# Altium PCB 示波器AD板最终实物版图.PcbDoc (part 2 of 2)
Units mil, origin at the board's own origin, x right, y up, seen from the top; angles counter-clockwise.
Board outline 10285 x 5540 mil, 2 copper layers (Top Layer, Bottom Layer); 84 components, 55 nets, 271 pads, 0 vias.
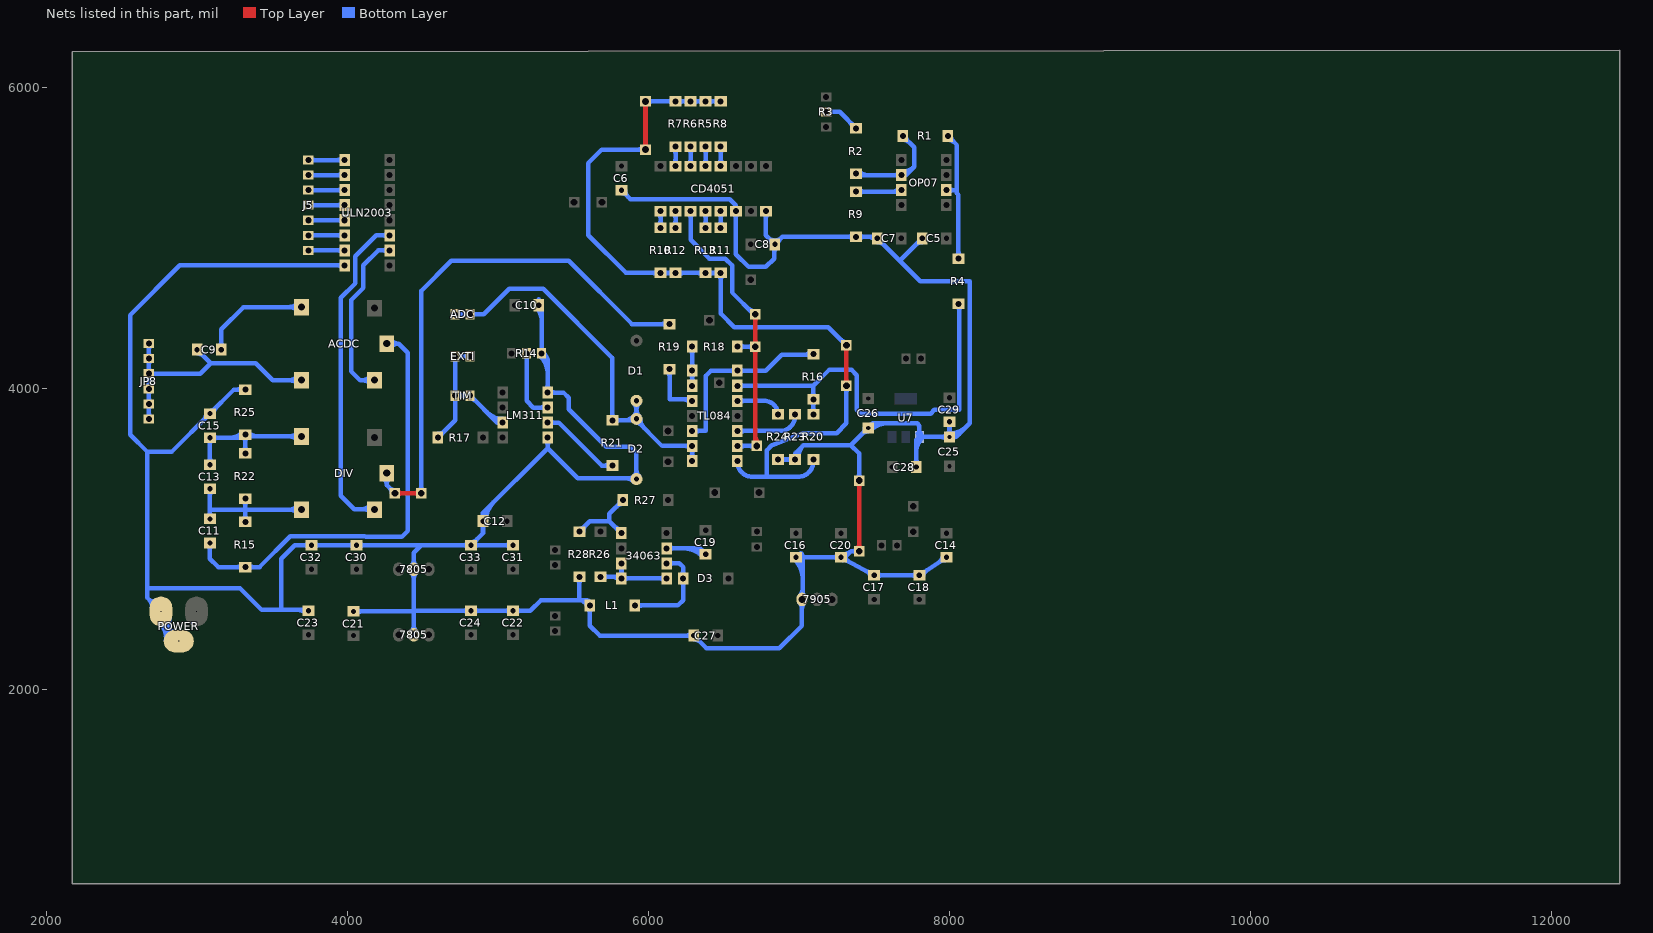
[diagram p2: the nets of this part, all layers, seen from the top]

## Nets (pads, with @x,y where several pads share a name; then routed paths per layer and width w, separated by ;. In a path a pad name is that pad's centre, name@x,y a point inside that pad or via, vN(x,y) a via of type N, cw(c..) or ccw(c..) an arc to the next point about the centre after c; other vN are vias at no path point) (continued)
GND: 7805.2 7905.1 C5.2 C6.1 C7.2 C8.2 C10.2 C12.2 C14.2 C15.1 C16.2 C17.1 C18.2 C20.1 C21.1 C22.1 C23.2 C24.2 C25.1 C26.1 C27.1 C28.2 C29.2 C30.1 C31.1 C32.2 C33.2 CD4051.6 CD4051.8 D2.1 L1.1 LM311.1 LM311.4 pad.7@7400,3390 pad.8@7400,2920 POWER.2 POWER.3 R9.1 R14.1 R23.1 R24.1 R25.2 R28.2 U7.1 ULN2003.8 | length 31496.3
  Top Layer w30: pad.8@7385.86,2934.14 ccw(c7351.72,2968.28) 7400,2968.28 ccw(c7448.28,2968.28) pad.8@7414.14,2934.14 ; pad.7@7385.86,3375.86 cw(c7351.72,3341.72) 7400,3341.72 cw(c7448.28,3341.72) pad.7@7414.14,3375.86 ; pad.8@7400,2920 pad.7@7400,3390
  Bottom Layer w30: POWER.3@2700.19,2549.62 ccw(c2639.35,2554.34) 2682.5,2597.49 ccw(c2706.01,2621) POWER.3@2725.27,2593.89 ; POWER.3@2747.52,2453.46 cw(c2635.76,2341.7) POWER.2@2793.23,2328.12 ; POWER.3@2760.01,2494.98 ccw(c2831.4,2474.57) 2778.9,2422.08 ; POWER.3@2788.86,2486.73 ccw(c2887.47,2458.55) POWER.2@2814.95,2386.03 ; 2793.09,2407.89 cw(c2719.66,2334.47) POWER.2@2823.12,2325.55 ; 2793.26,2407.72 ccw(c2853.01,2467.47) POWER.2@2853.01,2382.97 ; POWER.3@2817.7,2478.49 ccw(c2943.53,2442.52) POWER.2@2850.99,2349.98 ; POWER.2@2878.01,2322.97 2760.01,2440.96 POWER.3@2760.01,2519.98 2670,2609.99 2670,2675 ; 3042.32,3792.32 ccw(c2999.64,3835) C15.1@3060,3835 ; C15.1@3054.39,3804.39 cw(c3080,3778.79) C15.1@3080,3815 ; C15.1@3090,3855 ccw(c3090,3891.21) C15.1@3115.61,3865.61 ; C15.1@3110,3835 cw(c3170.36,3835) 3127.68,3877.68 ; R25.2@3300.86,3980.86 ccw(c3266.72,3946.72) 3266.72,3995 ccw(c3266.72,4043.28) R25.2@3300.86,4009.14 ; R25.2@3320,3995 3245,3995 C15.1@3085,3835 2830,3580 2670,3580 ; 3674.64,2530 cw(c3674.64,2464.64) C23.2@3720.86,2510.86 ; 3698.79,2530 ccw(c3698.79,2561.21) C23.2@3720.86,2539.14 ; C23.2@3740,2525 3735,2530 3560,2530 ; C32.2@3740.86,2945.86 ccw(c3706.72,2911.72) 3706.72,2960 ccw(c3706.72,3008.28) C32.2@3740.86,2974.14 ; C32.2@3779.14,2945.86 cw(c3813.28,2911.72) 3813.28,2960 cw(c3813.28,3008.28) C32.2@3779.14,2974.14 ; ULN2003.8@3965.86,4805.86 ccw(c3931.72,4771.72) 3931.72,4820 ccw(c3931.72,4868.28) ULN2003.8@3965.86,4834.14 ; ULN2003.8@3980,4820 2885,4820 2555,4490 2555,3695 2670,3580 ; C21.1@4040,2520 4440,2520 ; C30.1@4040.86,2945.86 ccw(c4006.72,2911.72) 4006.72,2960 ccw(c4006.72,3008.28) C30.1@4040.86,2974.14 ; C21.1@4059.14,2505.86 cw(c4093.28,2471.72) 4093.28,2520 cw(c4093.28,2568.28) C21.1@4059.14,2534.14 ; C30.1@4079.14,2945.86 cw(c4113.28,2911.72) 4113.28,2960 cw(c4113.28,3008.28) C30.1@4079.14,2974.14 ; 7805.2@4424.09,2388.41 ccw(c4385.68,2426.82) 4440,2426.82 ccw(c4494.32,2426.82) 7805.2@4455.91,2388.41 ; 7805.2@4424.09,2776.59 cw(c4385.68,2738.18) 4440,2738.18 cw(c4494.32,2738.18) 7805.2@4455.91,2776.59 ; 7805.2@4424.09,2823.41 ccw(c4385.68,2861.82) 4440,2861.82 ccw(c4494.32,2861.82) 7805.2@4455.91,2823.41 ; 7805.2@4440,2365 4440,2520 ; C24.2@4800.86,2510.86 ccw(c4766.72,2476.72) 4766.72,2525 ccw(c4766.72,2573.28) C24.2@4800.86,2539.14 ; C33.2@4800.86,2945.86 ccw(c4766.72,2911.72) 4766.72,2960 ccw(c4766.72,3008.28) C33.2@4800.86,2974.14 ; C33.2@4825,2980 ccw(c4825,3016.21) C33.2@4850.61,2990.61 ; C24.2@4839.14,2510.86 cw(c4873.28,2476.72) 4873.28,2525 cw(c4873.28,2573.28) C24.2@4839.14,2539.14 ; C33.2@4839.14,2945.86 cw(c4873.28,2911.72) 4873.28,2960 cw(c4873.28,3008.28) C33.2@4839.14,2974.14 ; C33.2@4845,2960 cw(c4905.36,2960) 4862.68,3002.68 ; C12.2@4885.86,3100.86 cw(c4851.72,3066.72) 4900,3066.72 cw(c4948.28,3066.72) C12.2@4914.14,3100.86 ; C12.2@4885.86,3139.14 ccw(c4851.72,3173.28) 4900,3173.28 ccw(c4948.28,3173.28) C12.2@4914.14,3139.14 ; C12.2@4890,3125 cw(c4986.57,3125) 4918.28,3193.28 ; C12.2@4920,3125 cw(c5088.99,3125) 4969.5,3244.5 ; C22.1@5080.86,2510.86 ccw(c5046.72,2476.72) 5046.72,2525 ccw(c5046.72,2573.28) C22.1@5080.86,2539.14 ; C31.1@5080.86,2945.86 ccw(c5046.72,2911.72) 5046.72,2960 ccw(c5046.72,3008.28) C31.1@5080.86,2974.14 ; C31.1@5100,2960 4965,2960 C33.2@4820,2960 ; C22.1@5119.14,2510.86 cw(c5153.28,2476.72) 5153.28,2525 cw(c5153.28,2573.28) C22.1@5119.14,2539.14 ; C10.2@5255.86,4535.86 cw(c5173.43,4453.43) 5290,4453.43 ; 5270,4595 C10.2@5270,4555 ; R14.1@5279.39,4219.39 cw(c5157.22,4097.22) 5330,4097.22 ; R14.1@5279.39,4250.61 ccw(c5253.79,4276.21) 5290,4276.21 ccw(c5326.21,4276.21) R14.1@5300.61,4250.61 ; R14.1@5290,4215 cw(c5290,4166.72) 5324.14,4200.86 ; C10.2@5290,4555 C10.2@5270,4555 ; R14.1@5300.61,4240.61 cw(c5229.64,4169.64) 5330,4169.64 ; LM311.1@5315.86,3655.86 cw(c5281.72,3621.72) 5330,3621.72 cw(c5378.28,3621.72) LM311.1@5344.14,3655.86 ; LM311.4@5315.86,3994.14 ccw(c5281.72,4028.28) 5330,4028.28 ccw(c5378.28,4028.28) LM311.4@5344.14,3994.14 ; LM311.1@5330,3675 5330,3605 ; LM311.4@5344.14,3960.86 cw(c5378.28,3926.72) 5378.28,3975 cw(c5378.28,4023.28) LM311.4@5344.14,3989.14 ; R28.2@5525.86,2735.86 cw(c5491.72,2701.72) 5540,2701.72 cw(c5588.28,2701.72) R28.2@5554.14,2735.86 ; R28.2@5540,2750 5540,2595 ; L1.1@5582,2595 cw(c5582,2555.4) L1.1@5619.46,2568.24 ; L1.1@5591.08,2558.51 ccw(c5540,2541) 5540,2595 ; L1.1@5595.86,2540.86 cw(c5561.72,2506.72) 5610,2506.72 cw(c5658.28,2506.72) L1.1@5624.14,2540.86 ; C6.1@5820,5320 5880,5260 6540,5260 6580,5220 ; C6.1@5825,5300 cw(c5825,5263.79) C6.1@5850.61,5289.39 ; C6.1@5845,5320 ccw(c5905.36,5320) 5862.68,5277.32 ; 5847.57,3405 cw(c5847.57,3327.57) D2.1@5902.32,3382.32 ; 5871.72,3405 ccw(c5871.72,3448.28) 5902.32,3417.68 ccw(c5859.64,3460.36) 5920,3460.36 ccw(c5980.36,3460.36) D2.1@5937.68,3417.68 ; C27.1@6285.86,2345.86 ccw(c6251.72,2311.72) 6251.72,2360 ccw(c6251.72,2408.28) C27.1@6285.86,2374.14 ; C27.1@6300,2335 cw(c6300,2274.64) 6342.68,2317.32 ; C27.1@6320,2355 ccw(c6356.21,2355) C27.1@6330.61,2329.39 ; 6563.82,5236.18 cw(c6512.26,5184.63) CD4051.6@6584.97,5179.26 ; CD4051.6@6565.86,5165.86 cw(c6531.72,5131.72) 6580,5131.72 cw(c6628.28,5131.72) CD4051.6@6594.14,5165.86 ; CD4051.6@6568,5196 ccw(c6550,5220) 6580,5220 ; CD4051.6@6592,5196 cw(c6610,5220) 6580,5220 ; CD4051.8@6765.86,5165.86 cw(c6731.72,5131.72) 6780,5131.72 cw(c6828.28,5131.72) CD4051.8@6794.14,5165.86 ; CD4051.8@6780,5180 6780,5020 C8.2@6840,4960 ; 6797.32,5002.68 ccw(c6840,5045.36) 6840,4985 ccw(c6840,5045.36) 6882.68,5002.68 ; C8.2@6809.39,4990.61 cw(c6783.79,4965) C8.2@6820,4965 ; C8.2@6825.86,4940.86 cw(c6803.79,4918.79) 6835,4918.79 ; 6835,4894.64 cw(c6900.36,4894.64) C8.2@6854.14,4940.86 ; R24.1@6860,3530 R23.1@6975,3530 6975,3570 ; C8.2@6860,4965 cw(c6896.21,4965) C8.2@6870.61,4990.61 ; R24.1@6879.14,3515.86 cw(c6913.28,3481.72) 6913.28,3530 cw(c6913.28,3578.28) R24.1@6879.14,3544.14 ; R23.1@6955.86,3515.86 ccw(c6921.72,3481.72) 6921.72,3530 ccw(c6921.72,3578.28) R23.1@6955.86,3544.14 ; R23.1@6963,3546 ccw(c6945,3570) 6975,3570 ; R23.1@6970.11,3528.5 cw(c7033.01,3538.04) 6988.03,3583.03 ; C16.2@6970.86,2865.86 cw(c6840.15,2735.15) 7025,2735.15 ; C16.2@6980,2880 7025,2880 ; R23.1@6987,3546 cw(c7005,3570) 6975,3570 ; C16.2@6992.07,2887.07 cw(c6912.57,2807.57) 7025,2807.57 ; C16.2@6999.14,2865.86 cw(c7033.28,2831.72) 7033.28,2880 cw(c7033.28,2928.28) C16.2@6999.14,2894.14 ; R23.1@6999.77,3533 cw(c7105.89,3549.1) 7030,3625 ; 7905.1@7004.09,2576.59 cw(c6965.68,2538.18) 7020,2538.18 cw(c7074.32,2538.18) 7905.1@7035.91,2576.59 ; 7905.1@7004.09,2623.41 ccw(c6953.61,2673.89) 7025,2673.89 ; C16.2@7013.28,2908.28 cw(c6985,2880) 7025,2880 ; 7025,2649.75 ccw(c7062.25,2649.75) 7905.1@7035.91,2623.41 ; C20.1@7260.86,2865.86 ccw(c7226.72,2831.72) 7226.72,2880 ccw(c7226.72,2928.28) C20.1@7260.86,2894.14 ; C20.1@7286.99,2899.9 ccw(c7293.95,2969.36) 7343.31,2920 ; C20.1@7290.64,2860.81 cw(c7301.96,2822.33) 7321.17,2857.54 ; C20.1@7304.19,2885.64 ccw(c7358.35,2901.57) 7331.32,2852.01 ; R9.1@7360.86,4995.86 ccw(c7326.72,4961.72) 7326.72,5010 ccw(c7326.72,5058.28) R9.1@7360.86,5024.14 ; pad.8@7385.86,2905.86 ccw(c7351.72,2871.72) 7351.72,2920 ccw(c7351.72,2968.28) pad.8@7385.86,2934.14 ; pad.7@7385.86,3404.14 ccw(c7351.72,3438.28) 7400,3438.28 ccw(c7448.28,3438.28) pad.7@7414.14,3404.14 ; R9.1@7399.14,4995.86 cw(c7433.28,4961.72) 7433.28,5010 cw(c7433.28,5058.28) R9.1@7399.14,5024.14 ; pad.8@7400,2920 7343.31,2920 ; pad.7@7400,3390 7400,3570 7345,3625 ; C26.1@7437.5,3740 cw(c7383.18,3740) 7421.59,3701.59 cw(c7460,3663.18) C26.1@7460,3717.5 ; 7448.68,2787.99 cw(c7421.65,2738.43) C17.1@7475.81,2754.36 ; C26.1@7454.7,3745.3 cw(c7514.32,3685.68) 7514.32,3770 ; 7458.83,2782.46 ccw(c7478.04,2817.67) C17.1@7489.36,2779.19 ; 7459.64,5010 cw(c7459.64,4944.64) C7.2@7505.86,4990.86 ; C26.1@7475.91,3724.09 cw(c7586.75,3613.25) 7586.75,3770 ; 7483.79,5010 ccw(c7483.79,5041.21) C7.2@7505.86,5019.14 ; C17.1@7519.14,2745.86 cw(c7553.28,2711.72) 7553.28,2760 cw(c7553.28,2808.28) C17.1@7519.14,2774.14 ; C7.2@7520,4975 cw(c7520,4914.64) 7562.68,4957.32 ; C7.2@7540,4995 ccw(c7576.21,4995) C7.2@7550.61,4969.39 ; C28.2@7765.86,3499.14 ccw(c7731.72,3533.28) 7780,3533.28 ccw(c7828.28,3533.28) C28.2@7794.14,3499.14 ; 7777.32,4957.32 cw(c7820,4914.64) C5.2@7820,4975 ; C28.2@7780,3480 7780,3660 U7.1@7795,3675 ; 7780,3586.71 cw(c7883.29,3586.71) U7.1@7810.25,3659.75 ; C18.2@7780.86,2745.86 ccw(c7746.72,2711.72) 7746.72,2760 ccw(c7746.72,2808.28) C18.2@7780.86,2774.14 ; C5.2@7789.39,4969.39 ccw(c7763.79,4995) C5.2@7800,4995 ; U7.1@7789.75,3700.25 ccw(c7764.99,3725.01) 7800,3725.01 ccw(c7835.01,3725.01) U7.1@7810.25,3700.25 ; U7.1@7795,3671.72 U7.1@7800,3680 ; U7.1@7795,3698.81 U7.1@7795,3675 ; C18.2@7808.92,2779.61 ccw(c7816.53,2817.67) C18.2@7838.07,2785.38 ; U7.1@7810.25,3669.75 cw(c7835.01,3644.99) 7835.01,3680 cw(c7835.01,3715.01) U7.1@7810.25,3690.25 ; C5.2@7820,5000 7673.35,4853.35 7666.65,4853.35 ; C18.2@7824.61,2756.08 cw(c7881.24,2744.75) 7849.21,2792.81 ; 7930.79,2847.19 ccw(c7898.76,2895.25) C14.2@7955.39,2883.92 ; C14.2@7941.93,2854.62 cw(c7963.47,2822.33) C14.2@7971.08,2860.39 ; C14.2@7980,2880 C18.2@7800,2760 C17.1@7500,2760 C20.1@7280,2880 ; C25.1@7984.09,3664.09 ccw(c7945.68,3625.68) 7945.68,3680 ccw(c7945.68,3734.32) 7984.09,3695.91 ccw(c7945.68,3734.32) 8000,3734.32 ccw(c8054.32,3734.32) C25.1@8015.91,3695.91 ; C29.2@7985.86,3765.86 cw(c7951.72,3731.72) 8000,3731.72 cw(c8048.28,3731.72) C29.2@8014.14,3765.86 ; C25.1@8000,3672.5 ccw(c8000,3763.03) 8064.02,3699.02 ; C25.1@8000,3702.5 ccw(c8000,3865.46) 8115.23,3750.23 ; C29.2@8000,3780 C25.1@8000,3680 ; C25.1@8018,3666.5 cw(c8045,3646.25) 8045,3680 ; C25.1@8018,3693.5 ccw(c8045,3713.75) 8045,3680 ; 2670,2675 2670,3580 ; 2670,2675 3285,2675 3430,2530 3560,2530 ; 3560,2530 3560,2870 3650,2960 C32.2@3760,2960 C30.1@4060,2960 4490,2960 ; 4440,2520 7805.2@4440,2800 4440,2910 4490,2960 ; 4440,2520 4445,2525 C24.2@4820,2525 C22.1@5100,2525 5215,2525 5285,2595 5540,2595 ; 4490,2960 C33.2@4820,2960 ; C33.2@4820,2960 4900,3040 C12.2@4900,3120 4900,3175 5330,3605 ; C10.2@5270,4555 5290,4535 R14.1@5290,4235 5330,4195 LM311.4@5330,3975 5435,3975 5470,3940 5470,3865 5720,3615 5880,3615 5920,3575 D2.1@5920,3400 5915,3405 5530,3405 5330,3605 ; 5540,2595 5575,2595 L1.1@5610,2560 5610,2425 5675,2360 C27.1@6300,2360 6385,2275 6870,2275 7020,2425 7905.1@7020,2600 7025,2605 7025,2880 ; 6580,5220 CD4051.6@6580,5180 6580,4895 6665,4810 6780,4810 6835,4865 6835,4955 C8.2@6840,4960 ; C8.2@6840,4960 6890,5010 R9.1@7380,5010 7510,5010 C7.2@7520,5000 7666.65,4853.35 ; 6975,3570 7030,3625 ; 7025,2880 ccw(c7025,2850) 7001,2868 cw(c7025,2850) 7025,2880 ; 7025,2880 cw(c7025,2910) 7001,2892 ccw(c7025,2910) 7025,2880 ; 7025,2880 C20.1@7280,2880 ; 7030,3625 7345,3625 ; C20.1@7280,2880 7303.31,2880 7343.31,2920 ; 7345,3625 C26.1@7460,3740 7490,3770 7785,3770 7800,3755 U7.1@7800,3680 ; 7666.65,4853.35 7805,4715 8135,4715 8135,3770 8045,3680 ; U7.1@7795,3675 U7.1@7800,3680 ; U7.1@7795,3675 7795,3671.74 U7.1@7800,3680 ; U7.1@7800,3680 C25.1@8000,3680 ; C25.1@8000,3680 8045,3680
NetC9_1: ACDC.3 C9.1 JP8.1 JP8.2 JP8.3 JP8.4 JP8.5 JP8.6 | length 2548.2
  Bottom Layer w30: JP8.6@2669.39,3810.61 ccw(c2643.79,3836.21) 2680,3836.21 ccw(c2716.21,3836.21) JP8.6@2690.61,3810.61 ; JP8.5@2669.39,3889.39 cw(c2643.79,3863.79) 2680,3863.79 cw(c2716.21,3863.79) JP8.5@2690.61,3889.39 ; JP8.5@2669.39,3910.61 ccw(c2643.79,3936.21) 2680,3936.21 ccw(c2716.21,3936.21) JP8.5@2690.61,3910.61 ; JP8.4@2669.39,3989.39 cw(c2643.79,3963.79) 2680,3963.79 cw(c2716.21,3963.79) JP8.4@2690.61,3989.39 ; JP8.4@2669.39,4010.61 ccw(c2643.79,4036.21) 2680,4036.21 ccw(c2716.21,4036.21) JP8.4@2690.61,4010.61 ; JP8.3@2669.39,4089.39 cw(c2643.79,4063.79) 2680,4063.79 cw(c2716.21,4063.79) JP8.3@2690.61,4089.39 ; JP8.3@2669.39,4110.61 ccw(c2643.79,4136.21) 2680,4136.21 ccw(c2716.21,4136.21) JP8.3@2690.61,4110.61 ; JP8.2@2669.39,4189.39 cw(c2643.79,4163.79) 2680,4163.79 cw(c2716.21,4163.79) JP8.2@2690.61,4189.39 ; JP8.2@2669.39,4210.61 ccw(c2643.79,4236.21) 2680,4236.21 ccw(c2716.21,4236.21) JP8.2@2690.61,4210.61 ; JP8.1@2669.39,4289.39 cw(c2643.79,4263.79) 2680,4263.79 cw(c2716.21,4263.79) JP8.1@2690.61,4289.39 ; JP8.6@2680,3800 JP8.5@2680,3900 JP8.4@2680,4000 JP8.3@2680,4100 ; JP8.1@2680,4300 JP8.2@2680,4200 JP8.3@2680,4100 ; JP8.3@2695.61,4089.39 cw(c2721.21,4063.79) 2721.21,4100 cw(c2721.21,4136.21) JP8.3@2695.61,4110.61 ; C9.1@3000,4235 cw(c3000,4174.64) 3042.68,4217.32 ; C9.1@3000,4260 3090,4170 ; C9.1@3020,4255 ccw(c3056.21,4255) C9.1@3030.61,4229.39 ; ACDC.3@3669.67,4032.9 ccw(c3611.26,3974.49) 3611.26,4057.09 ccw(c3611.26,4139.68) ACDC.3@3669.67,4081.28 ; ACDC.3@3693.86,4057.09 3502.91,4057.09 3390,4170 3090,4170 ; JP8.3@2680,4100 3020,4100 3090,4170
NetC9_2: ACDC.2 C9.2 | length 935.7
  Bottom Layer w30: C9.2@3145.86,4279.14 ccw(c3111.72,4313.28) 3160,4313.28 ccw(c3208.28,4313.28) C9.2@3174.14,4279.14 ; C9.2@3160,4260 3160,4395 3307.91,4542.91 ACDC.2@3693.86,4542.91 ; ACDC.2@3669.67,4518.72 ccw(c3611.26,4460.32) 3611.26,4542.91 ccw(c3611.26,4625.51) ACDC.2@3669.67,4567.1
NetC11_1: 
NetC11_2: ACDC.1 C11.2 R15.1 | length 3247.3
  Bottom Layer w30: C11.2@3070.86,2960.86 cw(c3036.72,2926.72) 3085,2926.72 cw(c3133.28,2926.72) C11.2@3099.14,2960.86 ; C11.2@3085,2975 3085,2870 3140,2815 R15.1@3320,2815 3415,2815 3620,3020 4115.36,3020 4120.36,3015 4360,3015 4400,3055 4400,4240 4340,4300 ; R15.1@3300.86,2800.86 ccw(c3266.72,2766.72) 3266.72,2815 ccw(c3266.72,2863.28) R15.1@3300.86,2829.14 ; R15.1@3339.14,2800.86 cw(c3373.28,2766.72) 3373.28,2815 cw(c3373.28,2863.28) R15.1@3339.14,2829.14 ; ACDC.1@4260,4300 4340,4300 ; ACDC.1@4284.74,4276.37 cw(c4340,4223.58) 4340,4300 ; ACDC.1@4284.74,4323.63 ccw(c4340,4376.42) 4340,4300
NetC13_1: C13.1 C15.2 DIV.2 R22.2 R25.1 | length 1592.4
  Bottom Layer w30: C13.1@3070.86,3509.14 ccw(c3036.72,3543.28) 3085,3543.28 ccw(c3133.28,3543.28) C13.1@3099.14,3509.14 ; C15.2@3070.86,3660.86 cw(c3036.72,3626.72) 3085,3626.72 cw(c3133.28,3626.72) C15.2@3099.14,3660.86 ; C13.1@3085,3495 C15.2@3085,3675 3300,3675 R25.1@3320,3695 ; C15.2@3104.14,3660.86 cw(c3138.28,3626.72) 3138.28,3675 cw(c3138.28,3723.28) C15.2@3104.14,3689.14 ; 3218.43,3675 ccw(c3218.43,3791.57) R25.1@3300.86,3709.14 ; R22.2@3305.86,3584.14 ccw(c3271.72,3618.28) 3320,3618.28 ccw(c3368.28,3618.28) R22.2@3334.14,3584.14 ; R25.1@3305.86,3680.86 cw(c3271.72,3646.72) 3320,3646.72 cw(c3368.28,3646.72) R25.1@3334.14,3680.86 ; R22.2@3320,3570 R25.1@3320,3695 ; R25.1@3339.14,3709.14 ccw(c3397.43,3767.43) 3397.43,3685 ; 3606.22,3685 cw(c3606.22,3595.28) DIV.2@3669.67,3658.72 ; 3616.3,3685 ccw(c3616.3,3760.47) DIV.2@3669.67,3707.1 ; DIV.2@3693.86,3682.91 3691.77,3685 3330,3685 R25.1@3320,3695
NetC19_2: 34063.3 C19.2 | length 661.4
  Bottom Layer w30: 34063.3@6120,2940 6340,2940 C19.2@6380,2900 ; 34063.3@6134.14,2925.86 cw(c6168.28,2891.72) 6168.28,2940 cw(c6168.28,2988.28) 34063.3@6134.14,2954.14 ; 6230.15,2940 cw(c6230.15,2755.15) C19.2@6360.86,2885.86 ; 6302.57,2940 cw(c6302.57,2827.57) C19.2@6382.07,2907.07 ; 6337.5,2942.5 cw(c6295.26,2900.25) C19.2@6355,2900.06 ; C19.2@6349.39,2930.61 ccw(c6375,2956.21) C19.2@6375,2920
NetD1_1: ADC.1 ADC.2 D1.1 D2.2 R21.2 TL084.6 TL084.7 | length 3449.9
  Bottom Layer w30: ADC.1@4715,4495 ADC.2@4815,4495 4905,4495 5075,4665 5300,4665 5760,4205 R21.2@5760,3790 D2.2@5920,3790 ; ADC.1@4725.61,4484.39 cw(c4751.21,4458.79) 4751.21,4495 cw(c4751.21,4531.21) ADC.1@4725.61,4505.61 ; ADC.2@4804.39,4484.39 ccw(c4778.79,4458.79) 4778.79,4495 ccw(c4778.79,4531.21) ADC.2@4804.39,4505.61 ; ADC.2@4825.61,4484.39 cw(c4851.21,4458.79) 4851.21,4495 cw(c4851.21,4531.21) ADC.2@4825.61,4505.61 ; R21.2@5745.86,3804.14 ccw(c5711.72,3838.28) 5760,3838.28 ccw(c5808.28,3838.28) R21.2@5774.14,3804.14 ; R21.2@5779.14,3775.86 cw(c5813.28,3741.72) 5813.28,3790 cw(c5813.28,3838.28) R21.2@5779.14,3804.14 ; 5835.5,3790 ccw(c5835.5,3884.5) 5902.32,3817.68 ccw(c5859.64,3860.36) 5920,3860.36 ccw(c5980.36,3860.36) D2.2@5937.68,3817.68 ; D1.1@5902.32,3902.32 cw(c5859.64,3859.64) 5920,3859.64 cw(c5980.36,3859.64) D1.1@5937.68,3902.32 ; D2.2@5920,3775 cw(c5920,3738.79) 5945.61,3764.39 ; D1.1@5920,3910 D2.2@5920,3790 ; D2.2@5945,3800 ccw(c6029.5,3800) 5969.75,3740.25 ; TL084.7@6275.86,3539.14 ccw(c6241.72,3573.28) 6290,3573.28 ccw(c6338.28,3573.28) TL084.7@6304.14,3539.14 ; TL084.6@6275.86,3600.86 cw(c6241.72,3566.72) 6290,3566.72 cw(c6338.28,3566.72) TL084.6@6304.14,3600.86 ; TL084.6@6275.86,3605.86 ccw(c6241.72,3571.72) 6241.72,3620 ccw(c6241.72,3668.28) TL084.6@6275.86,3634.14 ; TL084.7@6290,3520 TL084.6@6290,3620 6090,3620 D2.2@5920,3790
NetD3_2: 34063.2 D3.2 L1.2 | length 978.2
  Bottom Layer w30: L1.2@5910,2560 6195,2560 6230,2595 D3.2@6230,2740 6230,2815 6205,2840 34063.2@6120,2840 ; L1.2@5924.14,2545.86 cw(c5958.28,2511.72) 5958.28,2560 cw(c5958.28,2608.28) L1.2@5924.14,2574.14 ; 34063.2@6134.14,2825.86 cw(c6168.28,2791.72) 6168.28,2840 cw(c6168.28,2888.28) 34063.2@6134.14,2854.14 ; D3.2@6215.86,2720.86 cw(c6181.72,2686.72) 6230,2686.72 cw(c6278.28,2686.72) D3.2@6244.14,2720.86 ; D3.2@6215.86,2759.14 ccw(c6181.72,2793.28) 6230,2793.28 ccw(c6278.28,2793.28) D3.2@6244.14,2759.14
NetJ5_1: J5.1 ULN2003.1 | length 372.7
  Bottom Layer w30: J5.1@3740,5520 ULN2003.1@3980,5520 ; J5.1@3755.61,5509.39 cw(c3781.21,5483.79) 3781.21,5520 cw(c3781.21,5556.21) J5.1@3755.61,5530.61 ; ULN2003.1@3965.86,5505.86 ccw(c3931.72,5471.72) 3931.72,5520 ccw(c3931.72,5568.28) ULN2003.1@3965.86,5534.14
NetJ5_2: J5.2 ULN2003.2 | length 372.7
  Bottom Layer w30: J5.2@3740,5420 ULN2003.2@3980,5420 ; J5.2@3755.61,5409.39 cw(c3781.21,5383.79) 3781.21,5420 cw(c3781.21,5456.21) J5.2@3755.61,5430.61 ; ULN2003.2@3965.86,5405.86 ccw(c3931.72,5371.72) 3931.72,5420 ccw(c3931.72,5468.28) ULN2003.2@3965.86,5434.14
NetJ5_3: J5.3 ULN2003.3 | length 372.7
  Bottom Layer w30: J5.3@3740,5320 ULN2003.3@3980,5320 ; J5.3@3755.61,5309.39 cw(c3781.21,5283.79) 3781.21,5320 cw(c3781.21,5356.21) J5.3@3755.61,5330.61 ; ULN2003.3@3965.86,5305.86 ccw(c3931.72,5271.72) 3931.72,5320 ccw(c3931.72,5368.28) ULN2003.3@3965.86,5334.14
NetJ5_4: J5.4 ULN2003.4 | length 372.7
  Bottom Layer w30: J5.4@3740,5220 ULN2003.4@3980,5220 ; J5.4@3755.61,5209.39 cw(c3781.21,5183.79) 3781.21,5220 cw(c3781.21,5256.21) J5.4@3755.61,5230.61 ; ULN2003.4@3965.86,5205.86 ccw(c3931.72,5171.72) 3931.72,5220 ccw(c3931.72,5268.28) ULN2003.4@3965.86,5234.14
NetJ5_5: J5.5 ULN2003.5 | length 372.7
  Bottom Layer w30: J5.5@3740,5120 ULN2003.5@3980,5120 ; J5.5@3755.61,5109.39 cw(c3781.21,5083.79) 3781.21,5120 cw(c3781.21,5156.21) J5.5@3755.61,5130.61 ; ULN2003.5@3965.86,5105.86 ccw(c3931.72,5071.72) 3931.72,5120 ccw(c3931.72,5168.28) ULN2003.5@3965.86,5134.14
NetJ5_6: J5.6 ULN2003.6 | length 372.7
  Bottom Layer w30: J5.6@3740,5020 ULN2003.6@3980,5020 ; J5.6@3755.61,5009.39 cw(c3781.21,4983.79) 3781.21,5020 cw(c3781.21,5056.21) J5.6@3755.61,5030.61 ; ULN2003.6@3965.86,5005.86 ccw(c3931.72,4971.72) 3931.72,5020 ccw(c3931.72,5068.28) ULN2003.6@3965.86,5034.14
NetJ5_7: J5.7 ULN2003.7 | length 372.7
  Bottom Layer w30: J5.7@3740,4920 ULN2003.7@3980,4920 ; J5.7@3755.61,4909.39 cw(c3781.21,4883.79) 3781.21,4920 cw(c3781.21,4956.21) J5.7@3755.61,4930.61 ; ULN2003.7@3965.86,4905.86 ccw(c3931.72,4871.72) 3931.72,4920 ccw(c3931.72,4968.28) ULN2003.7@3965.86,4934.14
NetJ6_1: EXTI.1 EXTI.2 LM311.7 R17.2 TIM.1 TIM.2 | length 1759.8
  Bottom Layer w30: R17.2@4600,3675 4715,3790 TIM.1@4715,3955 ; R17.2@4600,3700 ccw(c4600,3760.36) 4642.68,3717.68 ; R17.2@4620,3680 cw(c4656.21,3680) R17.2@4630.61,3705.61 ; TIM.1@4704.39,3939.39 cw(c4678.79,3913.79) 4715,3913.79 cw(c4751.21,3913.79) TIM.1@4725.61,3939.39 ; TIM.1@4704.39,3970.61 ccw(c4678.79,3996.21) 4715,3996.21 ccw(c4751.21,3996.21) TIM.1@4725.61,3970.61 ; EXTI.1@4704.39,4199.39 cw(c4678.79,4173.79) 4715,4173.79 cw(c4751.21,4173.79) EXTI.1@4725.61,4199.39 ; TIM.1@4725.61,3944.39 cw(c4751.21,3918.79) 4751.21,3955 cw(c4751.21,3991.21) TIM.1@4725.61,3965.61 ; EXTI.1@4725.61,4204.39 cw(c4751.21,4178.79) 4751.21,4215 cw(c4751.21,4251.21) EXTI.1@4725.61,4225.61 ; TIM.2@4804.39,3944.39 ccw(c4778.79,3918.79) 4778.79,3955 ccw(c4778.79,3991.21) TIM.2@4804.39,3965.61 ; EXTI.2@4804.39,4204.39 ccw(c4778.79,4178.79) 4778.79,4215 ccw(c4778.79,4251.21) EXTI.2@4804.39,4225.61 ; TIM.2@4815,3935 cw(c4815,3886.72) 4849.14,3920.86 ; EXTI.2@4815,4215 EXTI.1@4715,4215 TIM.1@4715,3955 ; 4927.57,3842.43 ccw(c5030,3944.85) LM311.7@5030,3800 ; 4978.79,3791.21 ccw(c5030,3842.43) LM311.7@5030,3770 ; LM311.7@5030,3775 4995,3775 TIM.2@4815,3955 TIM.1@4715,3955
NetJP8_1: 
NetR1_1: OP07.6 R1.1 R4.2 | length 1161.5
  Bottom Layer w30: OP07.6@7980,5320 8050,5320 ; R1.1@7990,5655 cw(c7990,5594.64) 8032.68,5637.32 ; OP07.6@7994.14,5305.86 cw(c8028.28,5271.72) 8028.28,5320 cw(c8028.28,5368.28) OP07.6@7994.14,5334.14 ; R1.1@8010,5675 ccw(c8046.21,5675) R1.1@8020.61,5649.39 ; R1.1@8010,5680 R1.1@7990,5680 8050,5620 8050,5320 ; R4.2@8045.86,4879.14 ccw(c8011.72,4913.28) 8060,4913.28 ccw(c8108.28,4913.28) R4.2@8074.14,4879.14 ; R4.2@8060,4865 8060,5290 8050,5300 8050,5320
NetR1_2: OP07.2 R1.2 R2.1 | length 1000.4
  Bottom Layer w30: R2.1@7380,5430 7390,5420 7710,5420 7765,5475 ; R2.1@7399.14,5444.14 ccw(c7457.43,5502.43) 7457.43,5420 ; OP07.2@7665.86,5405.86 ccw(c7631.72,5371.72) 7631.72,5420 ccw(c7631.72,5468.28) OP07.2@7665.86,5434.14 ; OP07.2@7679.09,5415.04 ccw(c7683.73,5465.76) 7719.75,5429.75 ; OP07.2@7681.82,5444.92 ccw(c7691.33,5548.66) 7765,5475 ; R1.2@7690,5655 cw(c7690,5594.64) 7732.68,5637.32 ; R1.2@7690,5680 7765,5605 7765,5475 ; R1.2@7710,5675 ccw(c7746.21,5675) R1.2@7720.61,5649.39
NetR2_2: R2.2 R3.2 | length 378.3
  Bottom Layer w30: R3.2@7180,5840 7270,5840 R2.2@7380,5730 ; R3.2@7195.61,5829.39 cw(c7221.21,5803.79) 7221.21,5840 cw(c7221.21,5876.21) R3.2@7195.61,5850.61 ; 7337.32,5772.68 cw(c7294.64,5730) R2.2@7355,5730 ; R2.2@7349.39,5760.61 ccw(c7375,5786.21) R2.2@7375,5750
NetR4_1: R4.1 R16.2 R20.1 TL084.13 | length 3060
  Bottom Layer w30: TL084.13@6590,4020 7095,4020 ; TL084.13@6604.14,4005.86 cw(c6638.28,3971.72) 6638.28,4020 cw(c6638.28,4068.28) TL084.13@6604.14,4034.14 ; R20.1@7080.86,3844.14 ccw(c7046.72,3878.28) 7095,3878.28 ccw(c7143.28,3878.28) R20.1@7109.14,3844.14 ; R16.2@7080.86,3915.86 cw(c7046.72,3881.72) 7095,3881.72 cw(c7143.28,3881.72) R16.2@7109.14,3915.86 ; R16.2@7080.86,3944.14 ccw(c7046.72,3978.28) 7095,3978.28 ccw(c7143.28,3978.28) R16.2@7109.14,3944.14 ; R20.1@7095,3830 R16.2@7095,3930 7095,4020 ; R4.1@8050.86,4550.86 cw(c8016.72,4516.72) 8065,4516.72 cw(c8113.28,4516.72) R4.1@8079.14,4550.86 ; R4.1@8060,4565 8065,4560 8065,3860 7900,3860 7875,3835 7410,3835 7385,3860 7385,4090 7350,4125 7200,4125 7095,4020
NetR5_1: CD4051.13 R5.1 | length 281.7
  Bottom Layer w30: CD4051.13@6365.86,5494.14 ccw(c6331.72,5528.28) 6380,5528.28 ccw(c6428.28,5528.28) CD4051.13@6394.14,5494.14 ; R5.1@6365.86,5595.86 cw(c6331.72,5561.72) 6380,5561.72 cw(c6428.28,5561.72) R5.1@6394.14,5595.86 ; CD4051.13@6380,5480 R5.1@6380,5610
NetR5_2: pad.8@5980,5910 pad.9 pad.10 pad.11 R5.2 R6.2 R7.2 R8.2 R10.2 R11.2 R12.2 R13.2 R20.2 TL084.8 | length 7557.9
  Top Layer w30: pad.9@5965.86,5604.14 ccw(c5931.72,5638.28) 5980,5638.28 ccw(c6028.28,5638.28) pad.9@5994.14,5604.14 ; pad.8@5965.86,5895.86 cw(c5931.72,5861.72) 5980,5861.72 cw(c6028.28,5861.72) pad.8@5994.14,5895.86 ; pad.9@5980,5590 pad.8@5980,5910 ; pad.11@7300.86,4034.14 ccw(c7266.72,4068.28) 7315,4068.28 ccw(c7363.28,4068.28) pad.11@7329.14,4034.14 ; pad.10@7300.86,4275.86 cw(c7266.72,4241.72) 7315,4241.72 cw(c7363.28,4241.72) pad.10@7329.14,4275.86 ; pad.11@7315,4020 pad.10@7315,4290
  Bottom Layer w30: pad.9@5965.86,5575.86 ccw(c5931.72,5541.72) 5931.72,5590 ccw(c5931.72,5638.28) pad.9@5965.86,5604.14 ; pad.9@5980,5590 5690,5590 5600,5500 5600,5020 5850,4770 R10.2@6080,4770 R12.2@6180,4770 R13.2@6380,4770 R11.2@6480,4770 6480,4500 6570,4410 7195,4410 pad.10@7315,4290 ; pad.8@5980,5910 R7.2@6180,5910 R6.2@6280,5910 R5.2@6380,5910 R8.2@6480,5910 ; pad.8@5994.14,5895.86 cw(c6028.28,5861.72) 6028.28,5910 cw(c6028.28,5958.28) pad.8@5994.14,5924.14 ; R10.2@6060.86,4755.86 ccw(c6026.72,4721.72) 6026.72,4770 ccw(c6026.72,4818.28) R10.2@6060.86,4784.14 ; R10.2@6099.14,4755.86 cw(c6133.28,4721.72) 6133.28,4770 cw(c6133.28,4818.28) R10.2@6099.14,4784.14 ; R12.2@6160.86,4755.86 ccw(c6126.72,4721.72) 6126.72,4770 ccw(c6126.72,4818.28) R12.2@6160.86,4784.14 ; R7.2@6160.86,5895.86 ccw(c6126.72,5861.72) 6126.72,5910 ccw(c6126.72,5958.28) R7.2@6160.86,5924.14 ; R12.2@6199.14,4755.86 cw(c6233.28,4721.72) 6233.28,4770 cw(c6233.28,4818.28) R12.2@6199.14,4784.14 ; R7.2@6199.14,5895.86 cw(c6233.28,5861.72) 6233.28,5910 cw(c6233.28,5958.28) R7.2@6199.14,5924.14 ; R6.2@6260.86,5895.86 ccw(c6226.72,5861.72) 6226.72,5910 ccw(c6226.72,5958.28) R6.2@6260.86,5924.14 ; R6.2@6299.14,5895.86 cw(c6333.28,5861.72) 6333.28,5910 cw(c6333.28,5958.28) R6.2@6299.14,5924.14 ; R13.2@6360.86,4755.86 ccw(c6326.72,4721.72) 6326.72,4770 ccw(c6326.72,4818.28) R13.2@6360.86,4784.14 ; R5.2@6360.86,5895.86 ccw(c6326.72,5861.72) 6326.72,5910 ccw(c6326.72,5958.28) R5.2@6360.86,5924.14 ; R13.2@6399.14,4755.86 cw(c6433.28,4721.72) 6433.28,4770 cw(c6433.28,4818.28) R13.2@6399.14,4784.14 ; R5.2@6399.14,5895.86 cw(c6433.28,5861.72) 6433.28,5910 cw(c6433.28,5958.28) R5.2@6399.14,5924.14 ; R11.2@6460.86,4755.86 ccw(c6426.72,4721.72) 6426.72,4770 ccw(c6426.72,4818.28) R11.2@6460.86,4784.14 ; R8.2@6460.86,5895.86 ccw(c6426.72,5861.72) 6426.72,5910 ccw(c6426.72,5958.28) R8.2@6460.86,5924.14 ; R11.2@6465.86,4755.86 cw(c6431.72,4721.72) 6480,4721.72 cw(c6528.28,4721.72) R11.2@6494.14,4755.86 ; TL084.8@6590,3520 6590,3515 ccw(c6690,3515) 6690,3415 6785,3415 ; R20.2@7095,3530 7095,3515 cw(c6995,3515) 6995,3415 6785,3415 ; pad.10@7295,4290 ccw(c7246.72,4290) 7280.86,4324.14 ccw(c7315,4358.28) pad.10@7315,4310 ; pad.11@7300.86,4005.86 cw(c7266.72,3971.72) 7315,3971.72 cw(c7363.28,3971.72) pad.11@7329.14,4005.86 ; pad.11@7315,4020 7315,3770 7250,3705 7025,3705 6820,3625 6785,3590 6785,3415
NetR6_1: CD4051.14 R6.1 | length 281.7
  Bottom Layer w30: CD4051.14@6265.86,5494.14 ccw(c6231.72,5528.28) 6280,5528.28 ccw(c6328.28,5528.28) CD4051.14@6294.14,5494.14 ; R6.1@6265.86,5595.86 cw(c6231.72,5561.72) 6280,5561.72 cw(c6328.28,5561.72) R6.1@6294.14,5595.86 ; CD4051.14@6280,5480 R6.1@6280,5610
NetR7_1: CD4051.15 R7.1 | length 281.7
  Bottom Layer w30: CD4051.15@6165.86,5494.14 ccw(c6131.72,5528.28) 6180,5528.28 ccw(c6228.28,5528.28) CD4051.15@6194.14,5494.14 ; R7.1@6165.86,5595.86 cw(c6131.72,5561.72) 6180,5561.72 cw(c6228.28,5561.72) R7.1@6194.14,5595.86 ; CD4051.15@6180,5480 R7.1@6180,5610
NetR8_1: CD4051.12 R8.1 | length 281.7
  Bottom Layer w30: CD4051.12@6465.86,5494.14 ccw(c6431.72,5528.28) 6480,5528.28 ccw(c6528.28,5528.28) CD4051.12@6494.14,5494.14 ; R8.1@6465.86,5595.86 cw(c6431.72,5561.72) 6480,5561.72 cw(c6528.28,5561.72) R8.1@6494.14,5595.86 ; CD4051.12@6480,5480 R8.1@6480,5610
NetR9_2: OP07.3 R9.2 | length 455.8
  Bottom Layer w30: R9.2@7380,5310 7670,5310 OP07.3@7680,5320 ; R9.2@7399.14,5295.86 cw(c7433.28,5261.72) 7433.28,5310 cw(c7433.28,5358.28) R9.2@7399.14,5324.14 ; 7619.64,5310 ccw(c7619.64,5375.36) OP07.3@7665.86,5329.14 ; 7643.79,5310 cw(c7643.79,5278.79) OP07.3@7665.86,5300.86
NetR10_1: CD4051.1 R10.1 | length 261.7
  Bottom Layer w30: R10.1@6065.86,5084.14 ccw(c6031.72,5118.28) 6080,5118.28 ccw(c6128.28,5118.28) R10.1@6094.14,5084.14 ; CD4051.1@6065.86,5165.86 cw(c6031.72,5131.72) 6080,5131.72 cw(c6128.28,5131.72) CD4051.1@6094.14,5165.86 ; R10.1@6080,5070 CD4051.1@6080,5180
NetR11_1: CD4051.5 R11.1 | length 261.7
  Bottom Layer w30: R11.1@6465.86,5084.14 ccw(c6431.72,5118.28) 6480,5118.28 ccw(c6528.28,5118.28) R11.1@6494.14,5084.14 ; CD4051.5@6465.86,5165.86 cw(c6431.72,5131.72) 6480,5131.72 cw(c6528.28,5131.72) CD4051.5@6494.14,5165.86 ; R11.1@6480,5070 CD4051.5@6480,5180
NetR12_1: CD4051.2 R12.1 | length 261.7
  Bottom Layer w30: R12.1@6165.86,5084.14 ccw(c6131.72,5118.28) 6180,5118.28 ccw(c6228.28,5118.28) R12.1@6194.14,5084.14 ; CD4051.2@6165.86,5165.86 cw(c6131.72,5131.72) 6180,5131.72 cw(c6228.28,5131.72) CD4051.2@6194.14,5165.86 ; R12.1@6180,5070 CD4051.2@6180,5180
NetR13_1: CD4051.4 R13.1 | length 261.7
  Bottom Layer w30: R13.1@6365.86,5084.14 ccw(c6331.72,5118.28) 6380,5118.28 ccw(c6428.28,5118.28) R13.1@6394.14,5084.14 ; CD4051.4@6365.86,5165.86 cw(c6331.72,5131.72) 6380,5131.72 cw(c6428.28,5131.72) CD4051.4@6394.14,5165.86 ; R13.1@6380,5070 CD4051.4@6380,5180
NetR14_3: LM311.3 R14.2 | length 606.4
  Bottom Layer w30: R14.2@5179.39,4219.39 cw(c5153.79,4193.79) 5190,4193.79 cw(c5226.21,4193.79) R14.2@5200.61,4219.39 ; R14.2@5190,4235 5190,3920 5235,3875 LM311.3@5330,3875 ; LM311.3@5315.86,3860.86 ccw(c5281.72,3826.72) 5281.72,3875 ccw(c5281.72,3923.28) LM311.3@5315.86,3889.14
NetR15_2: C11.1 C13.2 DIV.3 R15.2 R22.1 | length 1397.8
  Bottom Layer w30: C11.1@3070.86,3149.14 ccw(c3036.72,3183.28) 3085,3183.28 ccw(c3133.28,3183.28) C11.1@3099.14,3149.14 ; C13.2@3070.86,3320.86 cw(c3036.72,3286.72) 3085,3286.72 cw(c3133.28,3286.72) C13.2@3099.14,3320.86 ; C11.1@3085,3135 3085,3195 ; C13.2@3085,3335 3085,3195 ; R15.2@3305.86,3129.14 ccw(c3271.72,3163.28) 3320,3163.28 ccw(c3368.28,3163.28) R15.2@3334.14,3129.14 ; R22.1@3305.86,3255.86 cw(c3271.72,3221.72) 3320,3221.72 cw(c3368.28,3221.72) R22.1@3334.14,3255.86 ; R15.2@3320,3115 3320,3195 ; R22.1@3320,3270 3320,3195 ; DIV.3@3669.67,3172.9 ccw(c3611.26,3114.49) 3611.26,3197.09 ccw(c3611.26,3279.68) DIV.3@3669.67,3221.28 ; DIV.3@3693.86,3197.09 3322.09,3197.09 3320,3195 ; 3085,3195 3320,3195
NetR16_1: R16.1 TL084.5 TL084.14 | length 1528.4
  Bottom Layer w30: TL084.5@6290,3720 6375,3720 ; TL084.5@6304.14,3705.86 cw(c6338.28,3671.72) 6338.28,3720 cw(c6338.28,3768.28) TL084.5@6304.14,3734.14 ; 6380,3720 6380,4085 6415,4120 TL084.14@6590,4120 6780,4120 6885,4225 7090,4225 R16.1@7095,4230 ; TL084.14@6575.86,4105.86 ccw(c6541.72,4071.72) 6541.72,4120 ccw(c6541.72,4168.28) TL084.14@6575.86,4134.14 ; TL084.14@6604.14,4105.86 cw(c6638.28,4071.72) 6638.28,4120 cw(c6638.28,4168.28) TL084.14@6604.14,4134.14 ; 7029.64,4225 ccw(c7029.64,4290.36) R16.1@7075.86,4244.14 ; 7053.79,4225 cw(c7053.79,4193.79) R16.1@7075.86,4215.86
NetR18_1: R18.1 TL084.1 TL084.2 | length 563.4
  Bottom Layer w30: TL084.2@6275.86,4039.14 ccw(c6241.72,4073.28) 6290,4073.28 ccw(c6338.28,4073.28) TL084.2@6304.14,4039.14 ; TL084.1@6275.86,4100.86 cw(c6241.72,4066.72) 6290,4066.72 cw(c6338.28,4066.72) TL084.1@6304.14,4100.86 ; TL084.1@6275.86,4139.14 ccw(c6241.72,4173.28) 6290,4173.28 ccw(c6338.28,4173.28) TL084.1@6304.14,4139.14 ; R18.1@6275.86,4260.86 cw(c6241.72,4226.72) 6290,4226.72 cw(c6338.28,4226.72) R18.1@6304.14,4260.86 ; TL084.2@6290,4020 TL084.1@6290,4120 R18.1@6290,4280
NetR18_2: CD4051.3 pad.5@6720,3620 pad.6@6710,4280 pad.7@6710,4495 R18.2 TL084.9 | length 2788
  Top Layer w30: pad.6@6695.86,4265.86 cw(c6661.72,4231.72) 6710,4231.72 cw(c6758.28,4231.72) pad.6@6724.14,4265.86 ; pad.6@6695.86,4294.14 ccw(c6661.72,4328.28) 6710,4328.28 ccw(c6758.28,4328.28) pad.6@6724.14,4294.14 ; pad.7@6695.86,4480.86 cw(c6661.72,4446.72) 6710,4446.72 cw(c6758.28,4446.72) pad.7@6724.14,4480.86 ; 6710,3692.43 ccw(c6792.43,3692.43) pad.5@6734.14,3634.14 ; pad.7@6710,4495 pad.6@6710,4280 6710,3630 pad.5@6720,3620
  Bottom Layer w30: CD4051.3@6265.86,5165.86 cw(c6231.72,5131.72) 6280,5131.72 cw(c6328.28,5131.72) CD4051.3@6294.14,5165.86 ; CD4051.3@6280,5180 6280,4990 6405,4865 6510,4865 6555,4820 6555,4640 6700,4495 pad.7@6710,4495 ; TL084.9@6590,3620 pad.5@6720,3620 ; R18.2@6590,4280 pad.6@6710,4280 ; TL084.9@6604.14,3605.86 cw(c6638.28,3571.72) 6638.28,3620 cw(c6638.28,3668.28) TL084.9@6604.14,3634.14 ; R18.2@6604.14,4265.86 cw(c6638.28,4231.72) 6638.28,4280 cw(c6638.28,4328.28) R18.2@6604.14,4294.14 ; 6658.79,4536.21 ccw(c6710,4587.43) pad.7@6710,4515 ; pad.6@6695.86,4265.86 ccw(c6661.72,4231.72) 6661.72,4280 ccw(c6661.72,4328.28) pad.6@6695.86,4294.14 ; pad.5@6705.86,3605.86 ccw(c6671.72,3571.72) 6671.72,3620 ccw(c6671.72,3668.28) pad.5@6705.86,3634.14
NetR19_1: DIV.1 pad.0@4315,3305 pad.1@4490,3305 R19.1 | length 4073.3
  Top Layer w30: pad.0@4315,3305 pad.1@4490,3305 ; pad.0@4329.14,3290.86 cw(c4363.28,3256.72) 4363.28,3305 cw(c4363.28,3353.28) pad.0@4329.14,3319.14 ; pad.1@4475.86,3290.86 ccw(c4441.72,3256.72) 4441.72,3305 ccw(c4441.72,3353.28) pad.1@4475.86,3319.14
  Bottom Layer w30: DIV.1@4237.78,3408.2 cw(c4196.62,3360) 4260,3360 ; DIV.1@4260,3440 4260,3360 ; DIV.1@4282.22,3408.2 ccw(c4323.38,3360) 4260,3360 ; pad.0@4295,3305 ccw(c4246.72,3305) 4280.86,3339.14 ccw(c4315,3373.28) pad.0@4315,3325 ; pad.0@4315,3305 4260,3360 ; pad.1@4475.86,3319.14 ccw(c4441.72,3353.28) 4490,3353.28 ccw(c4538.28,3353.28) pad.1@4504.14,3319.14 ; pad.1@4490,3305 4490,4650 4690,4850 5470,4850 5890,4430 R19.1@6140,4430 ; R19.1@6120.86,4415.86 ccw(c6086.72,4381.72) 6086.72,4430 ccw(c6086.72,4478.28) R19.1@6120.86,4444.14
NetR19_2: R19.2 TL084.3 | length 505.8
  Bottom Layer w30: R19.2@6125.86,4115.86 cw(c6091.72,4081.72) 6140,4081.72 cw(c6188.28,4081.72) R19.2@6154.14,4115.86 ; R19.2@6140,4130 6140,3930 6280,3930 TL084.3@6290,3920 ; 6229.64,3930 cw(c6229.64,3864.64) TL084.3@6275.86,3910.86 ; 6253.79,3930 ccw(c6253.79,3961.21) TL084.3@6275.86,3939.14
NetR21_1: LM311.2 R21.1 | length 699.7
  Bottom Layer w30: LM311.2@5330,3775 5405,3775 5690,3490 R21.1@5760,3490 ; LM311.2@5344.14,3760.86 cw(c5378.28,3726.72) 5378.28,3775 cw(c5378.28,3823.28) LM311.2@5344.14,3789.14 ; R21.1@5740.86,3475.86 ccw(c5706.72,3441.72) 5706.72,3490 ccw(c5706.72,3538.28) R21.1@5740.86,3504.14
NetR23_2: R23.2 TL084.10 | length 527.9
  Bottom Layer w30: TL084.10@6590,3720 6875,3720 ccw(c6875,3820) 6975,3820 R23.2@6975,3830 ; TL084.10@6604.14,3705.86 cw(c6638.28,3671.72) 6638.28,3720 cw(c6638.28,3768.28) TL084.10@6604.14,3734.14
NetR24_2: R24.2 TL084.12 | length 397.2
  Bottom Layer w30: TL084.12@6590,3920 6770,3920 cw(c6770,3830) R24.2@6860,3830 ; TL084.12@6604.14,3905.86 cw(c6638.28,3871.72) 6638.28,3920 cw(c6638.28,3968.28) TL084.12@6604.14,3934.14
NetR26_1: 34063.1 34063.7 34063.8 R26.1 | length 999.2
  Bottom Layer w30: R26.1@5680,2750 5810,2750 34063.8@5820,2740 ; R26.1@5699.14,2735.86 cw(c5733.28,2701.72) 5733.28,2750 cw(c5733.28,2798.28) R26.1@5699.14,2764.14 ; 5759.64,2750 cw(c5759.64,2684.64) 34063.8@5805.86,2730.86 ; 5783.79,2750 ccw(c5783.79,2781.21) 5805.86,2759.14 ccw(c5771.72,2793.28) 5820,2793.28 ccw(c5868.28,2793.28) 34063.8@5834.14,2759.14 ; 34063.7@5805.86,2820.86 cw(c5771.72,2786.72) 5820,2786.72 cw(c5868.28,2786.72) 34063.7@5834.14,2820.86 ; 34063.7@5820,2840 34063.8@5820,2740 ; 34063.8@5834.14,2725.86 cw(c5868.28,2691.72) 5868.28,2740 cw(c5868.28,2788.28) 34063.8@5834.14,2754.14 ; 34063.1@6105.86,2725.86 ccw(c6071.72,2691.72) 6071.72,2740 ccw(c6071.72,2788.28) 34063.1@6105.86,2754.14 ; 34063.1@6120,2740 34063.8@5820,2740
NetR27_2: 34063.5 R27.2 R28.1 | length 746.9
  Bottom Layer w30: R28.1@5540,3050 5610,3120 5740,3120 ; R28.1@5545,3070 ccw(c5545,3106.21) R28.1@5570.61,3080.61 ; R28.1@5565,3050 cw(c5625.36,3050) 5582.68,3092.68 ; 5777.32,3082.68 ccw(c5820,3125.36) 34063.5@5820,3065 ; 5787.32,3217.32 cw(c5830,3174.64) R27.2@5830,3235 ; 34063.5@5789.39,3070.61 cw(c5763.79,3045) 34063.5@5800,3045 ; R27.2@5799.39,3229.39 ccw(c5773.79,3255) R27.2@5810,3255 ; 34063.5@5820,3040 5740,3120 ; R27.2@5830,3260 5740,3170 5740,3120
RL1: ACDC.5 ULN2003.10 | length 1337.6
  Bottom Layer w30: ACDC.5@4154.31,4032.9 ccw(c4095.91,3974.49) 4095.91,4057.09 ccw(c4095.91,4139.68) ACDC.5@4154.31,4081.28 ; ACDC.5@4178.5,4057.09 4082.91,4057.09 4025,4115 4025,4590 4105,4670 4105,4820 4205,4920 ULN2003.10@4280,4920 ; ULN2003.10@4265.86,4905.86 ccw(c4231.72,4871.72) 4231.72,4920 ccw(c4231.72,4968.28) ULN2003.10@4265.86,4934.14
RL2: DIV.5 ULN2003.11 | length 2384.9
  Bottom Layer w30: 4088.97,3200 ccw(c4088.97,3292.41) DIV.5@4154.31,3227.07 ; 4102.85,3200 cw(c4102.85,3127.22) DIV.5@4154.31,3178.68 ; DIV.5@4178.5,3197.09 4175.59,3200 4045,3200 3955,3290 3955,4605 4050,4700 4050,4880 4190,5020 ULN2003.11@4280,5020 ; ULN2003.11@4265.86,5005.86 ccw(c4231.72,4971.72) 4231.72,5020 ccw(c4231.72,5068.28) ULN2003.11@4265.86,5034.14
pads on no net: LM311.5 LM311.6 OP07.1 OP07.5 OP07.8 U7.2 ULN2003.15 ULN2003.16

## Keep-outs
Keep-Out Layer:
  lines w20: 2405,2090 8330,2090 8330,6190 2405,6190 2405,6160 2405,2090

## Other copper
Bottom Layer:
  text "STM32示波器" at 3675,5870 h200
  text "青竹艺语 & BoX" at 3595,5665 h150
  text "2013-10-28" at 3415,5470 h150

## Silkscreen, mask and mechanical layers (free items; w line width, h text height)
Top Overlay:
  text "常开" at 3660,4445 h40
  text "常闭" at 3660,4135 h40
  text "常开" at 3660,3580 h40
  text "常闭" at 3665,3275 h40